# Altium PCB PCB24layer.PcbDoc
Units mil, origin at the board's own origin, x right, y up, seen from the top; angles counter-clockwise.
Board outline 6100 x 3965 mil, 4 copper layers (Top Layer, Middle Layer 1, Middle Layer 2, Bottom Layer), stack 30.634 mil thick; 51 components, 22 nets, 151 pads, 22 vias.
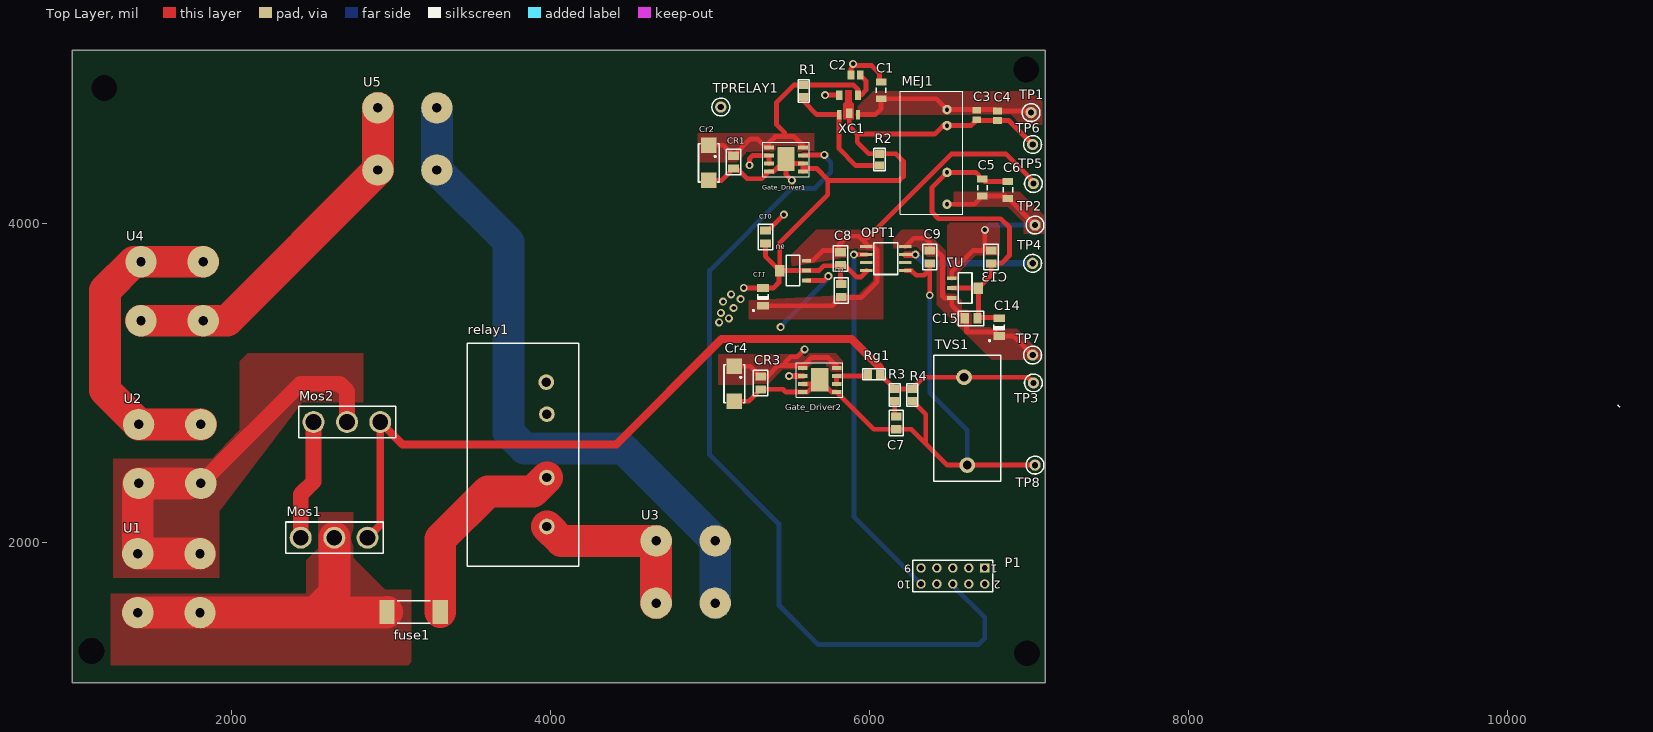
[diagram p0: Top Layer view]
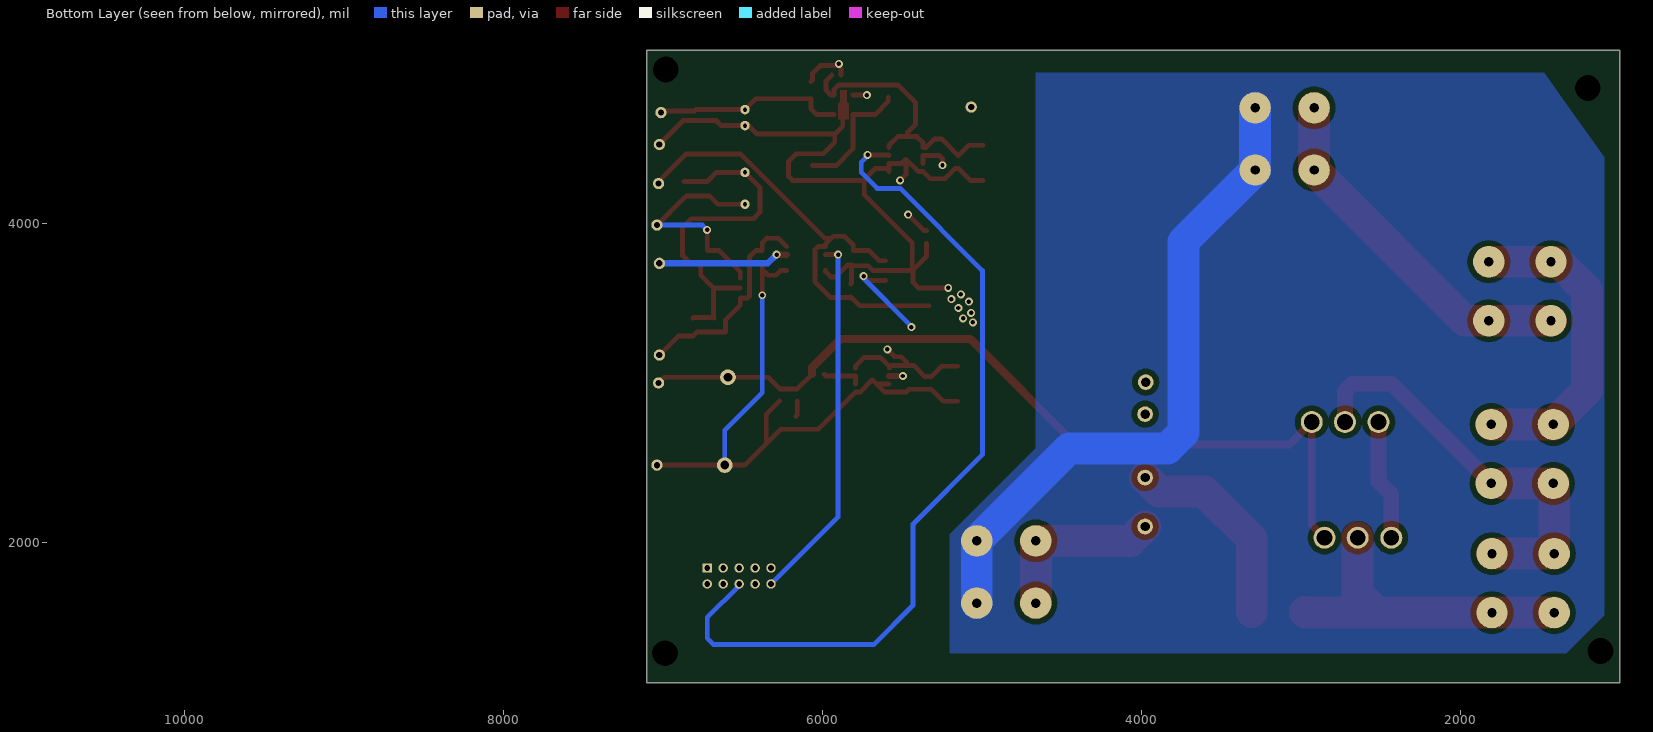
[diagram p1: Bottom Layer view, seen from below]
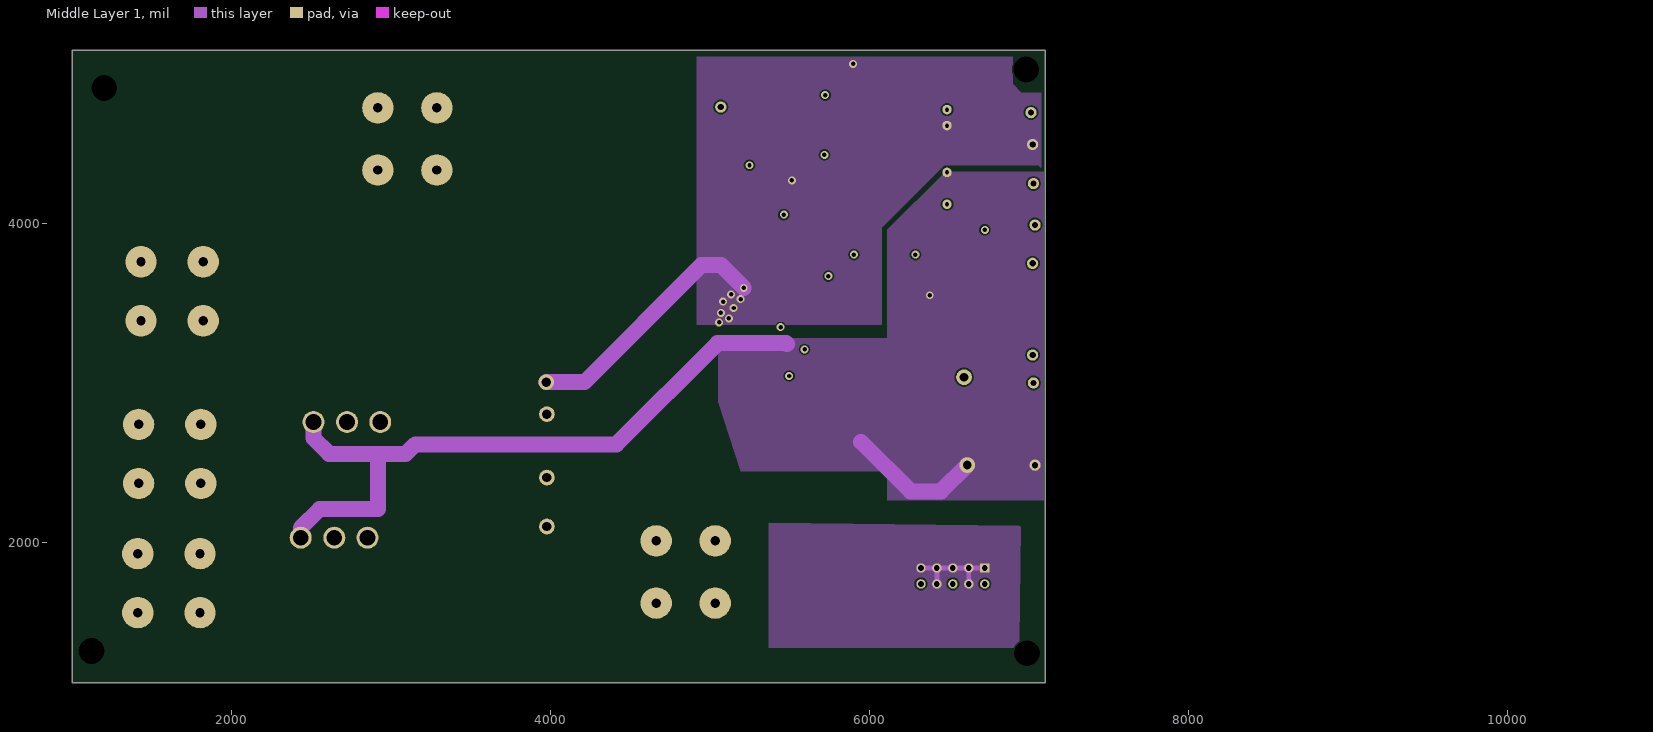
[diagram p2: Middle Layer 1]
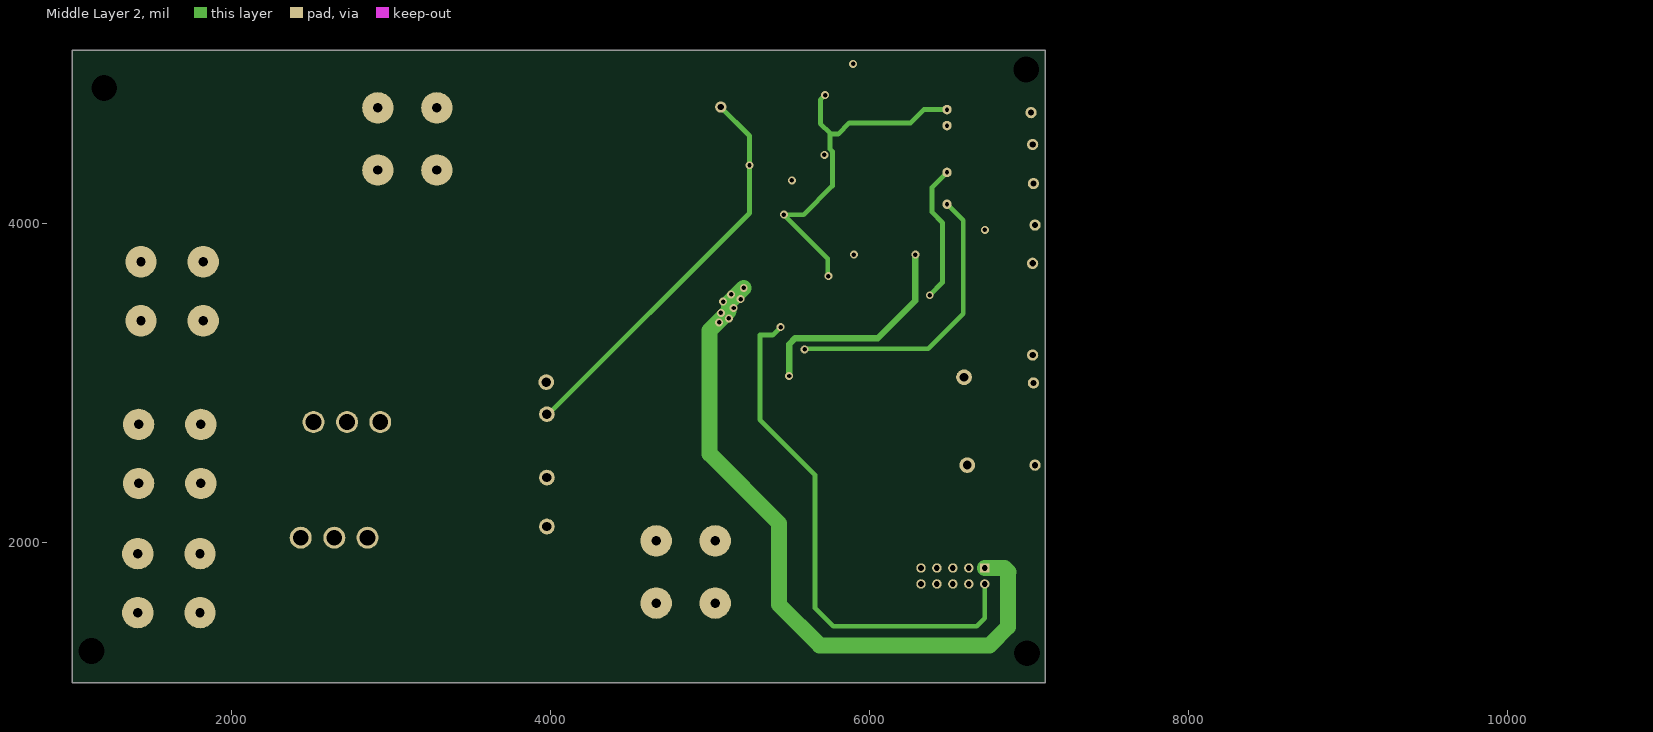
[diagram p3: Middle Layer 2]

## Layer stack, top to bottom
Top Solder: solder mask 0.4, Solder Resist, Dk 3.5
Top Layer: signal copper 1.4
Dielectric 1: core 10, FR-4, Dk 4.2
Middle Layer 1: signal copper 1.417
Dielectric 3: prepreg 5, Dk 4.2
Middle Layer 2: signal copper 1.417
Dielectric 2: core 10, Dk 4.2
Bottom Layer: signal copper 1.4
Bottom Solder: solder mask 0.4, Solder Resist, Dk 3.5

## Board outline
1000,1120 7100,1120 7100,5085 1000,5085

## Design rules (kind name [scope] priority, off if disabled: settings)
Clearance [All] p1: gap=10 ignorepadtopadclearanceinfootprint=FALSE
PlaneClearance [All] p1: clearance=40
PlaneConnect [All] p1: planeconnectstyle=Direct reliefexpansion=20 reliefentries=4 reliefconductorwidth=10 reliefairgap=10
PolygonConnect [All] p1: connectstyle=Direct reliefconductorwidth=10 reliefentries=4 polygonreliefangle="90 Angle" airgapwidth=10
RoutingVias [All] p1: holewidth=28 width=50 viastyle="Through Hole" minholewidth=28 minwidth=50 maxholewidth=28 maxwidth=50
SolderMaskExpansion [All] p1: expansion=4
Width [All] p1: maxlimit=500 minlimit=30 preferedwidth=100 minimp=50.000000 maximp=50.000000 favimp=50.000000
28 further rules are at their usual default settings.

## Classes and differential pairs
component class dspinterface: C1 C2 C3 C4 C5 C6 C7 CR1 Cr2 CR3 Cr4 Gate_Driver1 Gate_Driver2 MEJ1 P1 R1 R2 R3 R4 Rg1 TP1 TP2 TP3 TPRELAY1 TVS1 XC1
component class mainckt: fuse1 U1 U2 U3 U4 U5
component class optoiso: C8 C9 C10 C11 C12 C13 C14 C15 OPT1 TP4 TP5 TP6 TP7 TP8 U6 U7

## Components (designator, comment, footprint, x,y, rotation, side; value= is the part's Value field where it differs from the comment)
C1 "Cap Semi" C1206 6070,4835 r270 top value=100pF
C2 "Cap Pol3" C0805 5910,4930 r180 top value=100pF
C3 "Cap Pol3" C0805 6670,4680 r270 top value=100pF
C4 "Cap Pol3" C0805 6800,4675 r270 top value=100pF
C5 "Cap Semi" C1206 6705,4225 r270 top value=100pF
C6 "Cap Semi" C1206 6865,4210 r270 top value=100pF
C7 "Cap" "Capacitor 0805" 6165,2750 r90 top value=470nF
C8 "Cap" "Capacitor 0805" 5815,3780 r270 top value=470nF
C9 "Cap" "Capacitor 0805" 6375,3790 r270 top value=470nF
C10 "Cap" "Capacitor 0805" 5345,3915 r90 top value=470nF
C11 "Tantalium/T520A226M006ATE090" "Cap Tantal 3216" 5330,3535 r90 top value=22uF
C12 "Cap" "Capacitor 0805" 5820,3580 r270 top value=470nF
C13 "Cap" "Capacitor 0805" 6760,3790 r90 top value=470nF
C14 "Tantalium/T520A226M006ATE090" "Cap Tantal 3216" 6810,3345 r90 top value=22uF
C15 "Cap" "Capacitor 0805" 6635,3405 r180 top value=470nF
CR1 "100nF" Cap_SMD 5145,4390 r180 top
Cr2 "22uF" Cap_tantalum 4995,4395 r180 top
CR3 "100nF" Cap_SMD 5315,3005 r180 top
Cr4 "22uF" Cap_tantalum 5155,3010 r180 top
fuse1 "Fuse" fuse10a 3140,1565 r180 top
Gate_Driver1 "IXDN609SI" "Gate driver _low side"#1 5480,4410 r180 top
Gate_Driver2 "IXDN609SI" "Gate driver _low side"#2 5679.09,3026.89 r0 top
MEJ1 "MEJ2S1212SC" MEJ2 6385,4830 r270 top
Mos1 "mosfetacrelay" mosfet600v30A 2850,2030 r180 top
Mos2 "mosfetacrelay" mosfet600v30A 2930,2755 r180 top
OPT1 "Dig opto SI8421BB-D-IS" "SO8 TS27l2" 6100,3780 r0 top
P1 "Header 5X2" HDR2X5 6720,1840 r180 top
R1 "Res3" "0805 RES" 5585,4830 r90 top value=1K
R2 "Res3" "0805 RES" 6060,4400 r270 top value=1K
R3 "Res1-Metal Oxid Film" "0805 RES" 6155,2925 r90 top value=4.7
R4 "Res1-Metal Oxid Film" "0805 RES" 6265,2925 r90 top value=100k
relay1 "relayac" acrelay 3975,2100 r90 top
Rg1 "Res1-Metal Oxid Film" "0805 RES" 6025,3055 r0 top value=10
TP1 "Test Point" "Test Point" 7010,4695 r0 top
TP2 "Test Point" "Test Point" 7035,3990 r0 top
TP3 "Test Point" "Test Point" 7025,3000 r0 top
TP4 "Test point" "Test Point" 7020,3750 r0 top
TP5 "Test point" "Test Point" 7025,4250 r0 top
TP6 "Test point" "Test Point" 7020,4495 r0 top
TP7 "Test point" "Test Point" 7020,3175 r0 top
TP8 "Test point" "Test Point" 7035,2485 r90 top
TPRELAY1 "Test Point" "Test Point" 5065,4730 r90 top
TVS1 "TVS" TVS 6610,2485 r180 top
U1 "Connector 60A" newconn60A 2105,70 r90 top
U2 "L1" newconn60A 2110,880 r90 top
U3 "Connector 60A" newconn60A 3170,1315 r0 top
U4 "Connector 60A" newconn60A 1125,5250 r270 top
U5 "Connector 60A" newconn60A 1425,4030 r0 top
U6 "L78L05ABUTR" "Reg SOT-89 +5" 5435,3705 r0 top
U7 "L78L05ABUTR" "Reg SOT-89 +5" 6680,3595 r180 top
XC1 "XC6216C202PR-G" SOT-89-5 5865,4730 r180 top

## Footprints (in the part's own frame and the unit in brackets; to place one, negate y for a bottom-side part, rotate by r counter-clockwise, add the part's x,y. Pads: shape width x height; smd on the part's side, far side on the other; paste and mask are expansions set on the pad)
"0805 RES" [mm]
  rect 1.3x1.5 smd: 1(-0.95,0) 2(0.95,0)
  silkscreen extent -1.78,-0.89 1.78,0.89
acrelay [mm]
  round 2.5 hole 1.5: 1(0,0) 2(7.8,0) 3(17.9,0) 4(23,0.1)
  silkscreen extent -6.35,-5.08 29.21,12.7
C0805 [mm] "Chip Capacitor, Body 2.0x1.3mm, IPC High Density"
  rect 1.1x1.4 smd: 1(-0.75,0) 2(0.75,0)
  body extent -1.1,-0.72 1.1,0.72, height 1.4
C1206 [mm] "Chip Capacitor, Body 3.2x1.6mm, IPC High Density"
  rect 1.1x1.7 smd: 1(-1.35,0) 2(1.35,0)
  silkscreen extent -0.4,-0.75 0.4,0.75, body extent -1.7,-0.9 1.7,0.9, height 1.3
"Cap Tantal 3216" [mm]
  rect 1.25x1.85 smd: 1(-1.298,0) 2(1.552,0)
  silkscreen extent -2.16,-0.82 0.53,1.65, body extent -1.52,-0.9 1.78,0.9, height 1.6
Cap_SMD [mm]
  rect 1.7x1.3 smd: 1(0,-0.889) 2(0,1.143)
  silkscreen extent -1.14,-1.91 1.14,2.16
Cap_tantalum [mm]
  rect 2.5x2.5 smd: 1(0.127,-2.413) 2(0.127,3.175)
  silkscreen extent -1.52,-2.67 1.78,3.43, body extent -1.65,-2.79 1.91,3.56, height 3.3
"Capacitor 0805" [mm]
  rect 1.3x1.7 smd: 1(-1.016,0) 2(1.016,0)
  silkscreen extent -2.03,-1.14 2.03,1.14
fuse10a [mm]
  rect 2.4x3.8 smd: 1(-4.225,0) 2(4.225,0)
  silkscreen extent -2.65,-1.8 2.65,1.8, body extent -5.05,-1.88 5.05,1.87, height 2.37
"Gate driver _low side"#1 [mm]
  rect 1.55x0.6 smd: 1(-2.55,-1.7) 2(-2.55,-0.425) 3(-2.55,0.85) 4(-2.55,2.125) 5(2.85,2.125) 6(2.85,0.85) 7(2.85,-0.425) 8(2.85,-1.7)
  rect 2.74x3.8 smd: 4(0.15,0.175)
  silkscreen extent -3.55,-2.55 3.85,2.95
"Gate driver _low side"#2 [mm]
  rect 1.55x0.6 smd: 1(-2.55,1.7) 2(-2.55,0.425) 3(-2.55,-0.85) 4(-2.55,-2.125) 5(2.85,-2.125) 6(2.85,-0.85) 7(2.85,0.425) 8(2.85,1.7)
  rect 2.74x3.8 smd: 4(0.15,-0.175)
  silkscreen extent -3.55,-2.95 3.85,2.55
HDR2X5 [mm] "Connector; Header; 5x2 Position"
  rect 1.5x1.5 hole 0.9: 1(0,0)
  round 1.5 hole 0.9: 2(0,2.54) 3(2.54,0) 4(2.54,2.54) 5(5.08,0) 6(5.08,2.54) 7(7.62,0) 8(7.62,2.54) 9(10.16,0) 10(10.16,2.54)
  silkscreen extent -1.27,-1.27 11.43,3.81
MEJ2 [mm]
  round 1.5 hole 0.7: 1(2.95,2.5) 2(5.5,2.5) 5(12.95,2.5) 7(18.025,2.5)
  silkscreen extent 0,-4.95 19.65,5, body extent -0.05,-5 19.7,5.05, height 9.24
mosfet600v30A [mm]
  round 3.5 hole 2.5: D(5.28,0) G(0,0) S(10.63,0)
  silkscreen extent -2.5,-2.5 13,2.5
newconn60A [mm]
  round 5 hole 1.5: 1(37.846,7.747) 1(37.846,17.653) 2(47.244,7.747) 2(47.244,17.653)
"Reg SOT-89 +5" [mm]
  rect 1.5x0.6 smd: 1(4.25,1.57) 2(4.25,0) 3(4.25,-1.57)
  rect 1.5x1.83 smd: 2(0,0)
  round 1 on Top Overlay: 5(2.413,1.651)
  silkscreen extent 1.02,-2.41 3.17,2.41
"SO8 TS27l2" [mm]
  rect 2x0.5 smd: 1(-3.1,1.905) 2(-3.1,0.635) 3(-3.1,-0.635) 4(-3.1,-1.905) 5(3.1,-1.905) 6(3.1,-0.635) 7(3.1,0.635) 8(3.1,1.905)
  round 1 on Top Overlay: 9(-1.016,1.651)
  silkscreen extent -1.91,-2.54 1.91,2.54
SOT-89-5 [mm]
  rect 1x1.5 smd: 1(-1.525,-1.9) 2(-0.125,1) 3(1.475,-1.9)
  rect 0.7x1.5 smd: 4(1.475,1.2) 5(-1.525,1.2)
  Top Layer region: 0.5,-2.65 -0.55,-2.65 -0.55,-0.825 -0.875,-0.5 -0.875,1.95 0.825,1.95 0.825,-0.5 0.5,-0.825
"Test Point" [mm]
  round 1.8 hole 1: 1(0,0)
  silkscreen extent -1.42,-1.42 1.42,1.42
TVS [mm]
  round 2.5 hole 1.4: 1(0,0) 2(0.508,-14)
  silkscreen extent -5.33,-17.53 5.33,2.54

## Part data
C1 C5 C6: "Capacitor (Semiconductor SIM Model)", LatestRevisionDate=29-May-2009, LatestRevisionNote="IPC-7351 Footprint Added.", PackageDescription="Chip Capacitor", PackageReference=C1206, Published=8-Jun-2000, Publisher="Altium Limited"
C2 C3 C4: "Polarized Capacitor (Surface Mount)", LatestRevisionDate=29-May-2009, LatestRevisionNote="IPC-7351 Footprint Added.", PackageDescription="Chip Capacitor", PackageReference=C0805, Published=8-Jun-2000, Publisher="Altium Limited"
C7 C8 C9 C10 C12 C13 C15: "Capacitor", LatestRevisionDate=17-Jul-2002, LatestRevisionNote="Re-released for DXP Platform.", PackageReference=RAD-0.3, Published=8-Jun-2000, Publisher="Altium Limited"
C11 C14: library part "Cap Pol1", "Polarized Capacitor (Radial)", LatestRevisionDate=17-Jul-2002, LatestRevisionNote="Re-released for DXP Platform.", PackageReference=RB7.6-15, Published=8-Jun-2000, Publisher="Altium Limited"
CR1 CR3: library part Cap_SMD
Cr2 Cr4: library part Cap_tantalum
Gate_Driver1 Gate_Driver2: library part "Gate driver low side"
MEJ1: library part "Power supply2"
OPT1: library part Component_1
P1: "Header, 5-Pin, Dual row", LatestRevisionDate=17-Jul-2002, LatestRevisionNote="Re-released for DXP Platform.", Publisher="Altium Limited"
R1 R2: "Resistor", LatestRevisionDate=29-May-2009, LatestRevisionNote="IPC-7351 Footprint Added.", PackageDescription="Chip Resistor", PackageReference=J1-0603, Published=8-Jun-2000, Publisher="Altium Limited"
R3 R4 Rg1: library part Res1, "Resistor", LatestRevisionDate=17-Jul-2002, LatestRevisionNote="Re-released for DXP Platform.", PackageReference=AXIAL-0.3, Published=8-Jun-2000, Publisher="Altium Limited"
TP3: library part "Test point"
U2: library part "Connector 60A", "Connector 60A"
U6 U7: library part L78L05ABZ, "Positive Voltage Regulator", ComponentLink1Description="Manufacturer Link", ComponentLink1URL=http://www.st.com/, DatasheetVersion=Feb-1999, LatestRevisionDate=17-Jul-2002, LatestRevisionNote="Re-released for DXP Platform.", PackageDescription="TO, Flat Index; 3 In-Line, Axial Leads; Body Dia. 4.8mm; Leads 0.51 x 0.51 mm (max)", PackageReference=TO92, Published=24-Aug-2001, Publisher="Altium Limited"
XC1: library part "power supply"

## Free pads (board coordinates)
  round 0 hole 161.42: 14(6980,4965)
  round 0 hole 161.47: 15(1200,4850) 16(1120,1320) 17(6985,1305)

## Via types
v1: diameter 50, hole 28, Top Layer to Bottom Layer, 22 vias

## Nets (pads, with @x,y where several pads share a name; then routed paths per layer and width w, separated by ;. In a path a pad name is that pad's centre, name@x,y a point inside that pad or via, vN(x,y) a via of type N, cw(c..) or ccw(c..) an arc to the next point about the centre after c; other vN are vias at no path point)
5V_P: C8.1 C11.1 C12.2 OPT1.1 TP5.1 U6.1 | length 2940
  Top Layer w30: C11.1 5763.9,3483.9 C12.2 5825,3535 5945,3535 6045,3635 6045,3835 6025,3855 OPT1.1 5977.95,3872.05 5942.5,3907.5 ; U6.1 5641.81,3766.81 5705,3830 5805,3830 5805,3865 5860,3920 5930,3920 5942.5,3907.5 ; TP5.1 7025,4265 6855,4435 6510,4435 5982.5,3907.5 5942.5,3907.5
+5V_PW: C9.1 C14.1 C15.2 OPT1.8 TP7.1 U7.1 | length 1368.8
  Top Layer w30: OPT1.8 6275,3907.95 6342.95,3907.95 6345,3910 6375,3880 C9.1 6415,3830 6455,3790 6455,3545 6466.81,3533.19 U7.1 6512.68,3487.32 C15.2 6605,3395 6605,3320 6783.9,3320 C14.1 6901.1,3293.9 TP7.1
+12V_P: C1.2 C3.1 C4.1 C10.2 MEJ1.1 P1.2 TP1.1 U6.3 XC1.3 XC1.5 | length 7677.1
  Top Layer w30: C10.2 5360,3955 v1(5460,4055) ; v1(5440,3350) v1@5440,3355 ; U6.3 5713.19,3643.19 v1(5740,3670) ; v1(5719.8,4804.8) XC1.3 ; XC1.5 6032.76,4682.76 6070,4720 C1.2 6415.43,4781.85 MEJ1.1 C4.1@6790.67,4713.86 ; C4.1 7000.47,4704.53 TP1.1
  Middle Layer 1 w30: v1(5719.8,4804.8) v1@5720,4805
  Middle Layer 2 w30: v1(5440,3350) 5390,3300 5310,3300 5310,2770 5655,2425 5655,1590 5770,1475 6670,1475 6720,1525 P1.2 ; v1@5720,4805 v1(5719.8,4804.8) 5690,4775 5690,4625 5750,4565 ; v1(5740,3670) 5735,3665 5735,3780 v1(5460,4055) 5585,4055 5765,4235 5765,4450.71 5750,4465.71 5750,4565 ; MEJ1.1 6338.86,4713.86 6255,4630 5870,4630 5800,4560 5755,4560 5750,4565
  Bottom Layer w30: v1@5440,3355 5740,3655 v1(5740,3670)
+12V_PW: C5.2 C6.2 C13.2 CR3.1 Cr4.1 Gate_Driver2.1 Gate_Driver2.8 MEJ1.7 TP2.1 U7.3 | length 4167.7
  Top Layer w30: Cr4.1 5250,3105 CR3.1 5355,3040 5425,3110 5470,3110 ; v1(5590,3210) 5545,3165 5505,3165 5470,3130 5470,3110 ; Gate_Driver2.8 5791.3,3103.7 5735,3160 5635,3160 5578.7,3103.7 Gate_Driver2.1 5562.52,3110 5470,3110 ; MEJ1.7 6653.5,4120.35 C5.2 6850,4171.85 C6.2 6868.15,4156.85 TP2.1 ; U7.3 6512.68,3697.68 6645,3830 6715,3830 6720,3835 v1(6720,3960)
  Middle Layer 2 w30: v1(5590,3210) 5590,3215 6365,3215 6585,3435 6585,4018.78 MEJ1.7
  Bottom Layer w30: v1(6720,3960) 6750,3990 TP2.1
GND: C1.1 C2.2 C3.2 C4.2 C8.2 C10.1 C11.2 C12.1 CR1.2 Cr2.2 Gate_Driver1.3 Gate_Driver1.4 Gate_Driver1.5 MEJ1.2 OPT1.4 P1.1 P1.3 P1.4 P1.5 P1.7 P1.8 P1.9 R2.1 relay1.4 TP6.1 U6.2 XC1.2 | length 12214.6
  Top Layer w30: Cr2.2 5070,4270 CR1.2 5165,4345 5230,4280 5321.46,4280 Gate_Driver1.5 5397.32,4326.34 Gate_Driver1.4@5474.09,4403.11 ; v1(5208.9,3596.1) C11.2 5396.1,3596.1 5430,3630 5430,3700 U6.2@5435,3705 ; C10.1 5345,3795 U6.2@5435,3705 ; v1(5510,4270) 5474.09,4305.91 Gate_Driver1.4@5474.09,4403.11 ; Gate_Driver1.4@5580.39,4326.34 5580.39,4360 ; 5735,4265 5735,4180 5435,3880 U6.2@5435,3705 ; C12.1 5815,3625 C8.2 ; XC1.2 5869.92,4610.08 5920,4560 ; C2.2 5880.47,4970.47 5900,4990 6010,4990 6055,4945 6060,4945 6060,4898.15 C1.1 ; OPT1.4 5977.95,3697.95 5945,3665 5915,3665 5840,3740 C8.2 ; TP6.1 6869.53,4645.47 C4.2 6665,4645.47 6632.99,4613.46 MEJ1.2 6458.46,4613.46 6405,4560 5920,4560 ; U6.2@5435,3705 5602.32,3705 5680,3705 5710,3735 5810,3735 C8.2 ; Gate_Driver1.4@5474.09,4403.11 5500.67,4376.54 Gate_Driver1.3 5580.39,4360 ; 5580.39,4360 5595.39,4345 5665,4345 5740,4270 6185,4270 6210,4295 6210,4390 6162.6,4437.4 R2.1 5992.6,4437.4 5920,4510 5920,4560
  Middle Layer 1 w30: P1.9 P1.7 ; P1.8 P1.7 ; P1.4 P1.3 ; P1.1 P1.3 ; P1.7 P1.5 P1.3
  Middle Layer 1 w100: relay1.4 4210.51,3005.51 4945,3740 5065,3740 v1(5208.9,3596.1)
  Middle Layer 2 w30: 6865,1810 6870,1815
  Middle Layer 2 w100: v1(5208.9,3596.1) 5115,3502.2 5115,3450 4995,3330 4995,2555 5430,2120 5430,1610 5685,1355 6750,1355 6865,1470 6865,1810 ; P1.1 6845,1840 6870,1815
  other v1: 5055,3380 5115,3405 5065,3440 5145,3470 5080,3510 5190,3525 5130,3555 5895,5000
NetC2_1: C2.1 CR1.1 Cr2.1 Gate_Driver1.1 Gate_Driver1.8 R1.2 XC1.1 | length 1773.6
  Top Layer w30: Cr2.1 5080,4490 CR1.1 5250,4530 5295,4530 5348.07,4476.93 Gate_Driver1.8 5367.8,4507.8 5405,4545 5465,4545 ; Gate_Driver1.1 5580.39,4489.61 5525,4545 5465,4545 ; C2.1 5975,4894.53 5975,4835 5944.8,4804.8 XC1.1 5925.04,4839.96 5897.6,4867.4 R1.2 5522.4,4867.4 5415,4760 5415,4620 5465,4570 5465,4545
NetC7_2: C7.2 R3.1 | length 101.7
  Top Layer w30: R3.1 6155,2800 C7.2
Netfuse1_1: fuse1.1 relay1.2 | length 1284.8
  Top Layer w200: fuse1.1 3306.34,2021.34 3605,2320 3887.91,2320 relay1.2
Netfuse1_2: fuse1.2 Mos1.D U1.1 | length 2086.3
  Top Layer w200: U1.1@1410,1560 1800,1560 2520,1560 ; Mos1.D 2642.13,1682.13 2520,1560 ; fuse1.2 2968.66,1560 2520,1560
NetGate_Driver1_2: Gate_Driver1.2 P1.6 | length 5388.3
  Top Layer w30: Gate_Driver1.2 5583.66,4430 v1(5715,4430)
  Bottom Layer w30: v1(5715,4430) 5715,4425 5755,4385 5755,4320 5655,4220 5510,4220 4995,3705 4995,2550 5430,2115 5430,1605 5675,1360 6680,1360 6720,1400 6720,1530 6520,1730 P1.6
NetGate_Driver1_6: Gate_Driver1.6 Gate_Driver1.7 relay1.3 TPRELAY1.1 | length 2753.6
  Top Layer w30: v1(5245,4365) 5245,4405 5266.73,4426.73 Gate_Driver1.7 Gate_Driver1.6
  Middle Layer 2 w30: relay1.3 3984.72,2804.72 5245,4065 v1(5245,4365) 5245,4550 TPRELAY1.1
NetGate_Driver2_2: Gate_Driver2.2 OPT1.7 TP4.1 | length 2299.6
  Top Layer w40: v1(5493.62,3043.62) Gate_Driver2.2 ; OPT1.7 v1(6285,3805)
  Middle Layer 2 w40: v1(5493.62,3043.62) 5493.62,3243.62 5530,3280 6050,3280 6285,3515 v1(6285,3805)
  Bottom Layer w40: v1(6285,3805) 6340,3750 TP4.1
NetGate_Driver2_6: Gate_Driver2.6 Gate_Driver2.7 Rg1.1 | length 251.2
  Top Layer w30: Gate_Driver2.6 Gate_Driver2.7 5976.22,3043.62 Rg1.1
NetMos1_G: Mos1.G Mos2.G R3.2 R4.2 Rg1.2 TP3.1 TVS1.2 | length 5384.5
  Top Layer w30: Rg1.2 R3.2 R4.2 6338.78,3036.18 TVS1.2 6988.82,3036.18 TP3.1
  Top Layer w50: Mos1.G 2930,2110 Mos2.G 3070,2615 4410,2615 5070,3275 5885,3275 6062.4,3097.6 Rg1.2
NetMos2_D: Mos2.D U1.2 U2.1 | length 2535.5
  Top Layer w100: U2.1@1805,2370 2430,2995 2675,2995 2722.13,2947.87 Mos2.D
  Top Layer w200: U2.1@1730,2370 1415,2370 1410,2365 1410,1930 U1.2@1800,1930
NetOPT1_2: OPT1.2 P1.10 | length 2316.9
  Top Layer w30: v1(5900,3805) OPT1.2
  Bottom Layer w30: v1(5900,3805) 5900,2160 P1.10
NetR1_1: R1.1 R2.2 XC1.4 | length 795
  Top Layer w30: R1.1 5585,4765 5667.24,4682.76 XC1.4 5806.93,4468.07 5912.4,4362.6 R2.2
Netrelay1_1: relay1.1 U3.1 | length 1112.3
  Top Layer w200: relay1.1 4065,2010 4660,2010 U3.1@4660,1620
NetU2_2: U2.2 U4.1 | length 2006.5
  Top Layer w200: U2.2@1805,2740 1415,2740 1415,2745 1205,2955 1205,3580 1385,3760 1430,3760 U4.1@1820,3760
NetU3_2: U3.2 U5.2 | length 4188.1
  Bottom Layer w200: U5.2@3285,4725 3285,4335 3735,3885 3735,2690 3835,2590 4450,2590 5030,2010 U3.2@5030,1620
NetU4_2: U4.2 U5.1 | length 2266.4
  Top Layer w200: U4.2@1430,3390 1820,3390 1970,3390 2915,4335 U5.1@2915,4725
POWER_GND: C5.1 C6.1 C7.1 C9.2 C13.1 C14.2 C15.1 CR3.2 Cr4.2 Gate_Driver2.3 Gate_Driver2.4 Gate_Driver2.5 MEJ1.5 Mos1.S Mos2.S OPT1.5 R4.1 TP8.1 TVS1.1 U7.2 | length 13087.9
  Top Layer w30: Cr4.2 5240,2885 CR3.2 5455,2960 5471.77,2943.23 5578.7,2943.23 5608.23,2943.23 Gate_Driver2.4@5658.43,2993.43 ; Gate_Driver2.3 Gate_Driver2.4@5658.43,2993.43 ; OPT1.5 6260,3705 6290,3675 6340,3675 ; R4.1 6350,2802.6 6350,2620 ; 6345,3680 6375,3710 ; v1(6375,3550) 6375,3710 ; C9.2 6375,3710 ; U7.2@6512.68,3595 U7.2@6680,3595 ; C15.1@6676.1,3406.1 C15.1@6680,3410 ; C13.1 6760,3675 U7.2@6680,3595 ; 6800,3750 6825,3750 6875,3800 6875,3975 6820,4030 6430,4030 6390,4070 6390,4226.73 MEJ1.5 6662.99,4320.16 C5.1 6720,4263.15 C6.1 ; C14.2 6806.1,3410 C15.1@6680,3410 ; TP8.1 TVS1.1 6485,2485 6350,2620 ; Gate_Driver2.4@5658.43,2993.43 5685,3020 5761.77,2943.23 Gate_Driver2.5 6024.53,2710 C7.1 6260,2710 6350,2620 ; C15.1@6680,3410 U7.2@6680,3595
  Top Layer w100: Mos1.S 2431.5,2301.5 2511.5,2381.5 Mos2.S@2511.5,2753.5
  Middle Layer 1 w100: Mos1.S 2431.5,2091.5 2550,2210 2915,2210 2915,2555 ; Mos2.S@2511.5,2753.5 2511.5,2653.5 2610,2555 2915,2555 ; 5480,3245 5475,3250 5045,3250 4410,2615 3150,2615 3090,2555 2915,2555 ; 5945,2630 6255,2320 6445,2320 TVS1.1
  Middle Layer 2 w30: v1(6375,3550) 6455,3630 6455,4005 6390,4070 6390,4226.73 MEJ1.5
  Middle Layer 2 w100: Mos2.S@2511.5,2753.5 Mos2.S
  Bottom Layer w30: v1(6375,3550) 6375,2940 6610,2705 TVS1.1
pads on no net: OPT1.3 OPT1.6 OPT1.9 U6.5 U7.5

## Polygon pours and split planes (outlines as drawn)
GND on Middle Layer 1 "gnd" (solid, pour order 76): 5365,2125 5365,1340 6700,1340 6935,1340 6945,2095 6935,2105
GND on Middle Layer 1 "gnd" (solid, pour order 65): 4915,5045 6070,5045 6070,4160 4915,4160
GND on Middle Layer 1 "gnd" (solid, pour order 69): 4913.19,4170 6075,4170 6075,3365 4913.19,3365
POWER_GND on Middle Layer 1 "Pgnd" (solid, pour order 73): 5050,3280 5050,2883.25 5190,2445 6185,2445 6190,3280
POWER_GND on Middle Layer 1 "Pgnd" (solid, pour order 71): 6475,4325 6110,3960 6110,2265 7090,2265 7090,4325
GND on Middle Layer 1 "gnd" (solid, pour order 110): 6085,5045 6090,5045 6895,5045 6895,4875 6950,4820 7075,4820 7075,4345 7055,4365 6465,4365 6077.5,3977.5 6075,3980 6055,3980 6055,5030 6040,5045
NetU3_2 on Bottom Layer "netu3_2" (solid, pour order 78): 1355,4780 1472.53,4945 4660,4945 4660,2590 5200,2050 5200,1305 1335,1305 1095,1545 1095,4415
+12V_PW on Top Layer "netufuse" (solid, pour order 104): 6965,4005 6865,4105 6530,4105 6525,4110 6525,4200 6940,4200 7090,4050 7090,3950 7090,3935 7095,3935 6965,3935
5V_P on Top Layer "netufuse" (solid, pour order 102): 6025,3830 6020,3825 6020,3645 5930,3555 5240,3520 5240,3400 6085,3400 6085,3830.49
+12V_PW on Top Layer "netufuse" (solid, pour order 98): 6560,3650 6560,3695 6665,3800 6815,3800 6815,3990 6800,4005 6500,4005 6485,3990 6485,3645
+5V_PW on Top Layer "netufuse" (solid, pour order 96): 6145,3905 6200,3960 6345,3960 6475,3830 6475,3560 6535,3560 6575,3520 6575,3460 6610,3460 6640,3430 6640,3350 6755,3350 6765,3340 6920,3340 7080,3180 7080,3145 6765,3145 6420,3490 6420,3790 6360,3790 6295,3855 6270,3855 6260,3845 6145,3845
5V_P on Top Layer "netufuse" (solid, pour order 94): 5505,3800 5665,3960 6090,3960 6085,3955 6085,3830 5935,3830 5925,3840 5850,3840 5850,3785 5840.5,3785 5510,3730
+12V_P on Top Layer "netufuse" (solid, pour order 92): 5925,4735 6020,4830 7015,4830 7080,4765 7080,4620 6945,4620 6885,4680 5918.53,4680
NetC2_1 on Top Layer "netufuse" (solid, pour order 90): 4925,4384.88 4920,4565 5650,4565 5650,4455 5645,4450 5545,4450 5545,4477.5 5530,4485 5515,4485 5410,4485 5410,4465 5395,4450 5220,4450 5220,4440 5164.88,4384.88
+12V_PW on Top Layer "netufuse" (solid, pour order 86): 5050,3180 5575,3180 5595,3160 5620,3185 5785,3185 5830,3140 5830,3070 5760,3070 5725,3105 5725,3125 5645,3125 5600,3085 5585,3085 5455,3085 5360,2990 5050,2990
NetMos2_D on Top Layer "netufuse" (solid, pour order 84): 1870,2130 2480,2930 2445,3125 1870,2520 1448.24,2520
Netfuse1_2 on Top Layer "netufuse" (solid, pour order 80): 1239.4,1680 1290,1680 2465,1680 2465,1890 2540,1965 2540,2190 2760,2190 2760,1905 2960,1705 3125,1705 3125,1250 3105,1230 1239.4,1230
NetMos2_D on Top Layer "netufuse" (solid, pour order 82): 1255,2525 1895,2525 2050,2680 2050,3135 2100,3185 2825,3185 2825,2880 2380,2880 1920,2420 1920,1780 1280,1780 1255,1780

## Silkscreen, mask and mechanical layers (free items; w line width, h text height)
Top Overlay:
  lines w10: 10690,2860 10700,2850
Mechanical 13:
  lines w10: 1005,1125 7095,1125 7095,5080 1005,5080 1005,1125

## Text inside footprints (layer, text, board x,y; h text height)
P1: Top Overlay "2" at 6820,1760 h50 r180; Top Overlay "1" at 6800,1860 h50 r180; Top Overlay "9" at 6260,1860 h50 r180; Top Overlay "10" at 6260,1760 h50 r180